# Altium PCB F030K6T6.pcbdoc
Units mil, origin at the board's own origin, x right, y up, seen from the top; angles counter-clockwise.
Board outline 2900 x 2885 mil, 2 copper layers (Top Layer, Bottom Layer); 42 components, 39 nets, 149 pads, 115 vias.
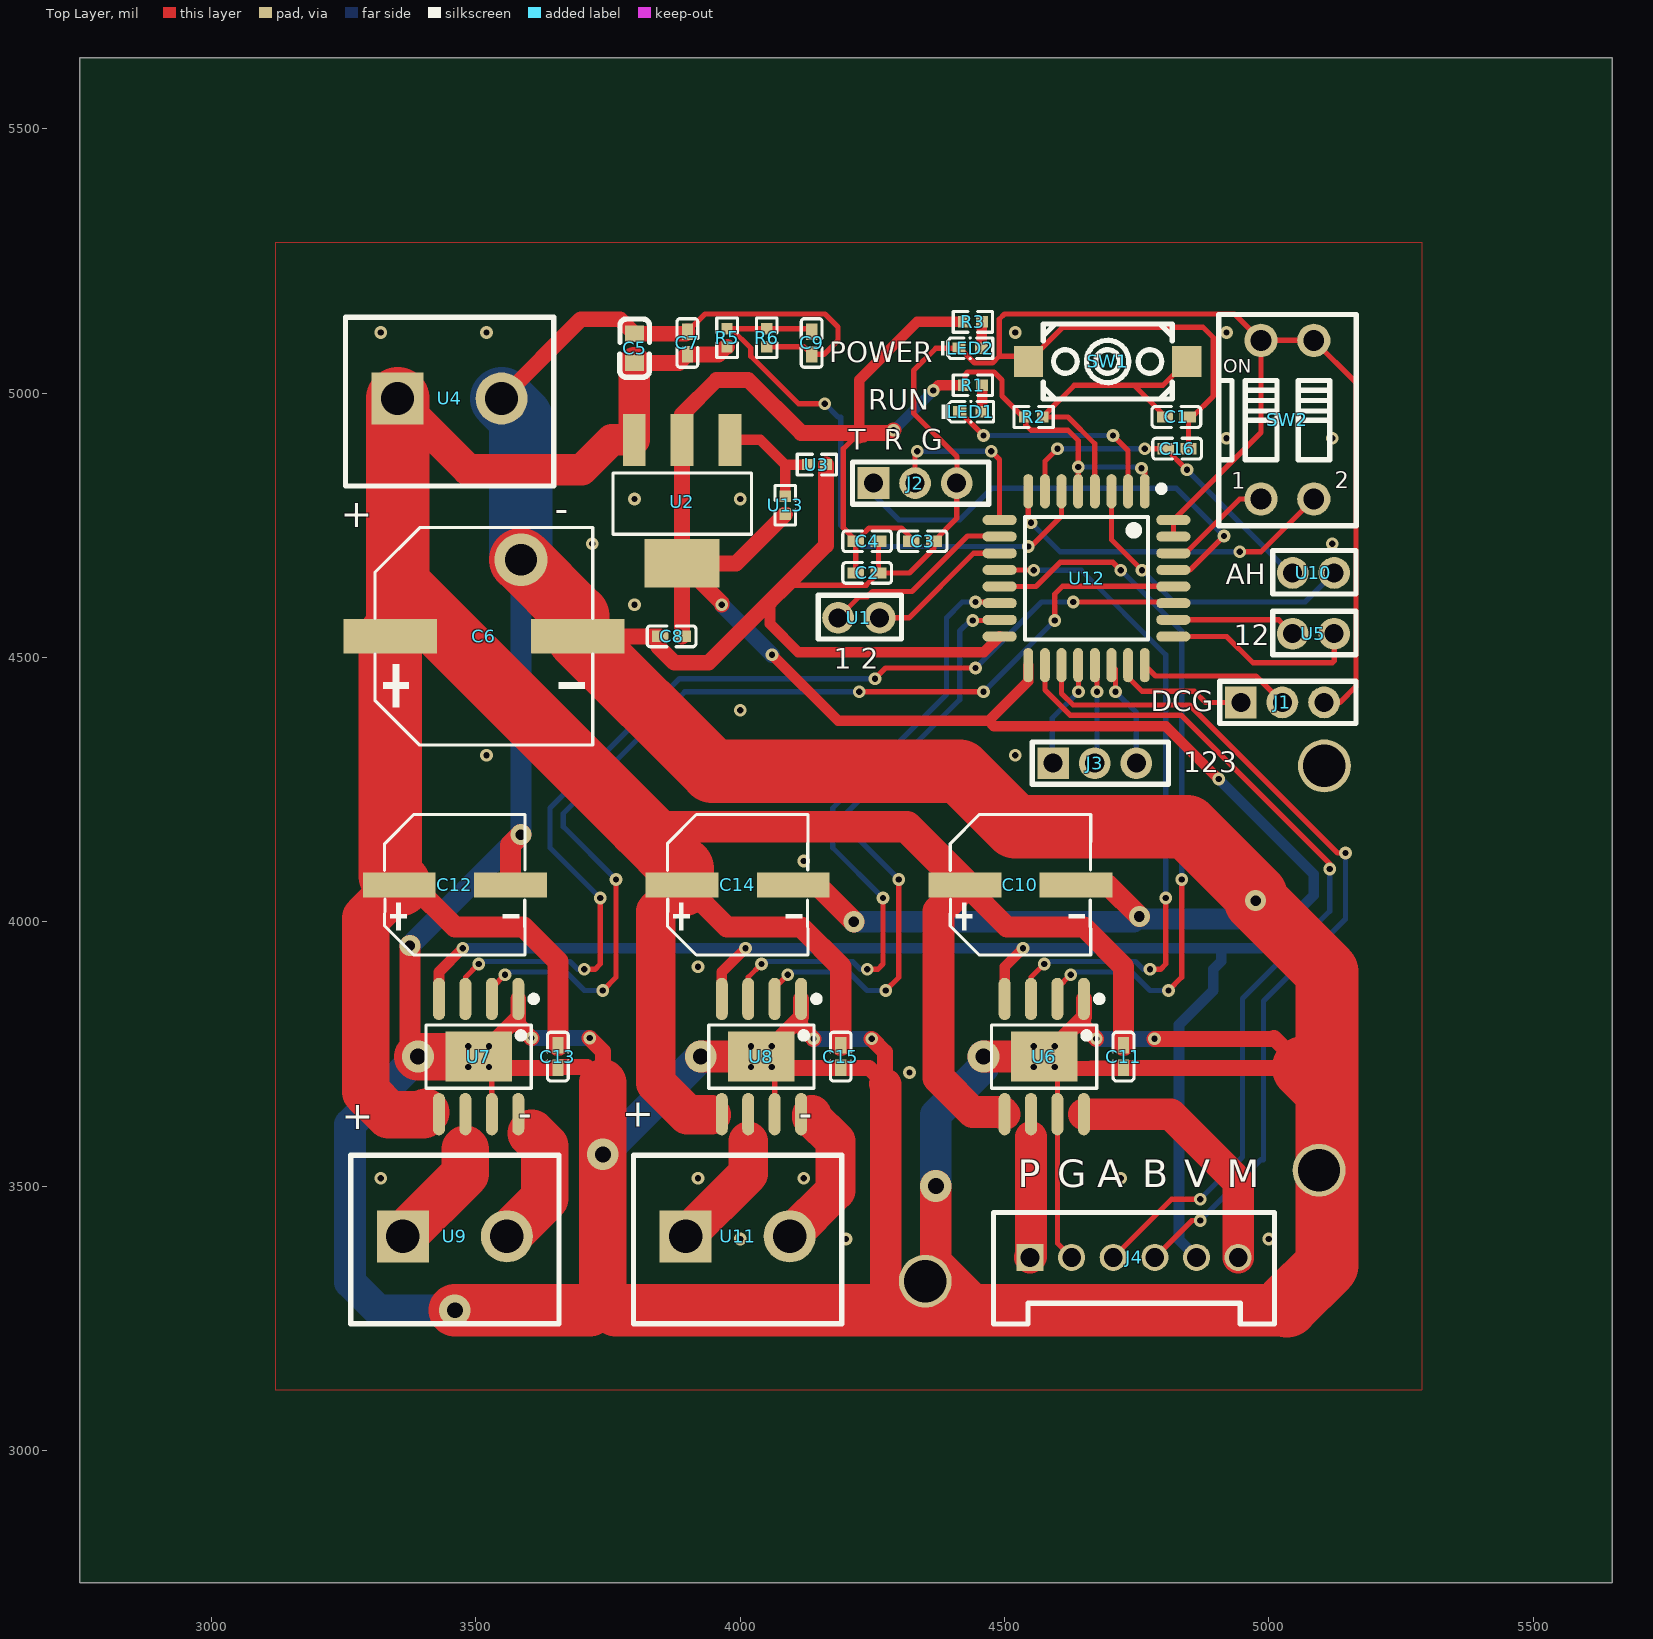
[diagram p0: Top Layer view]
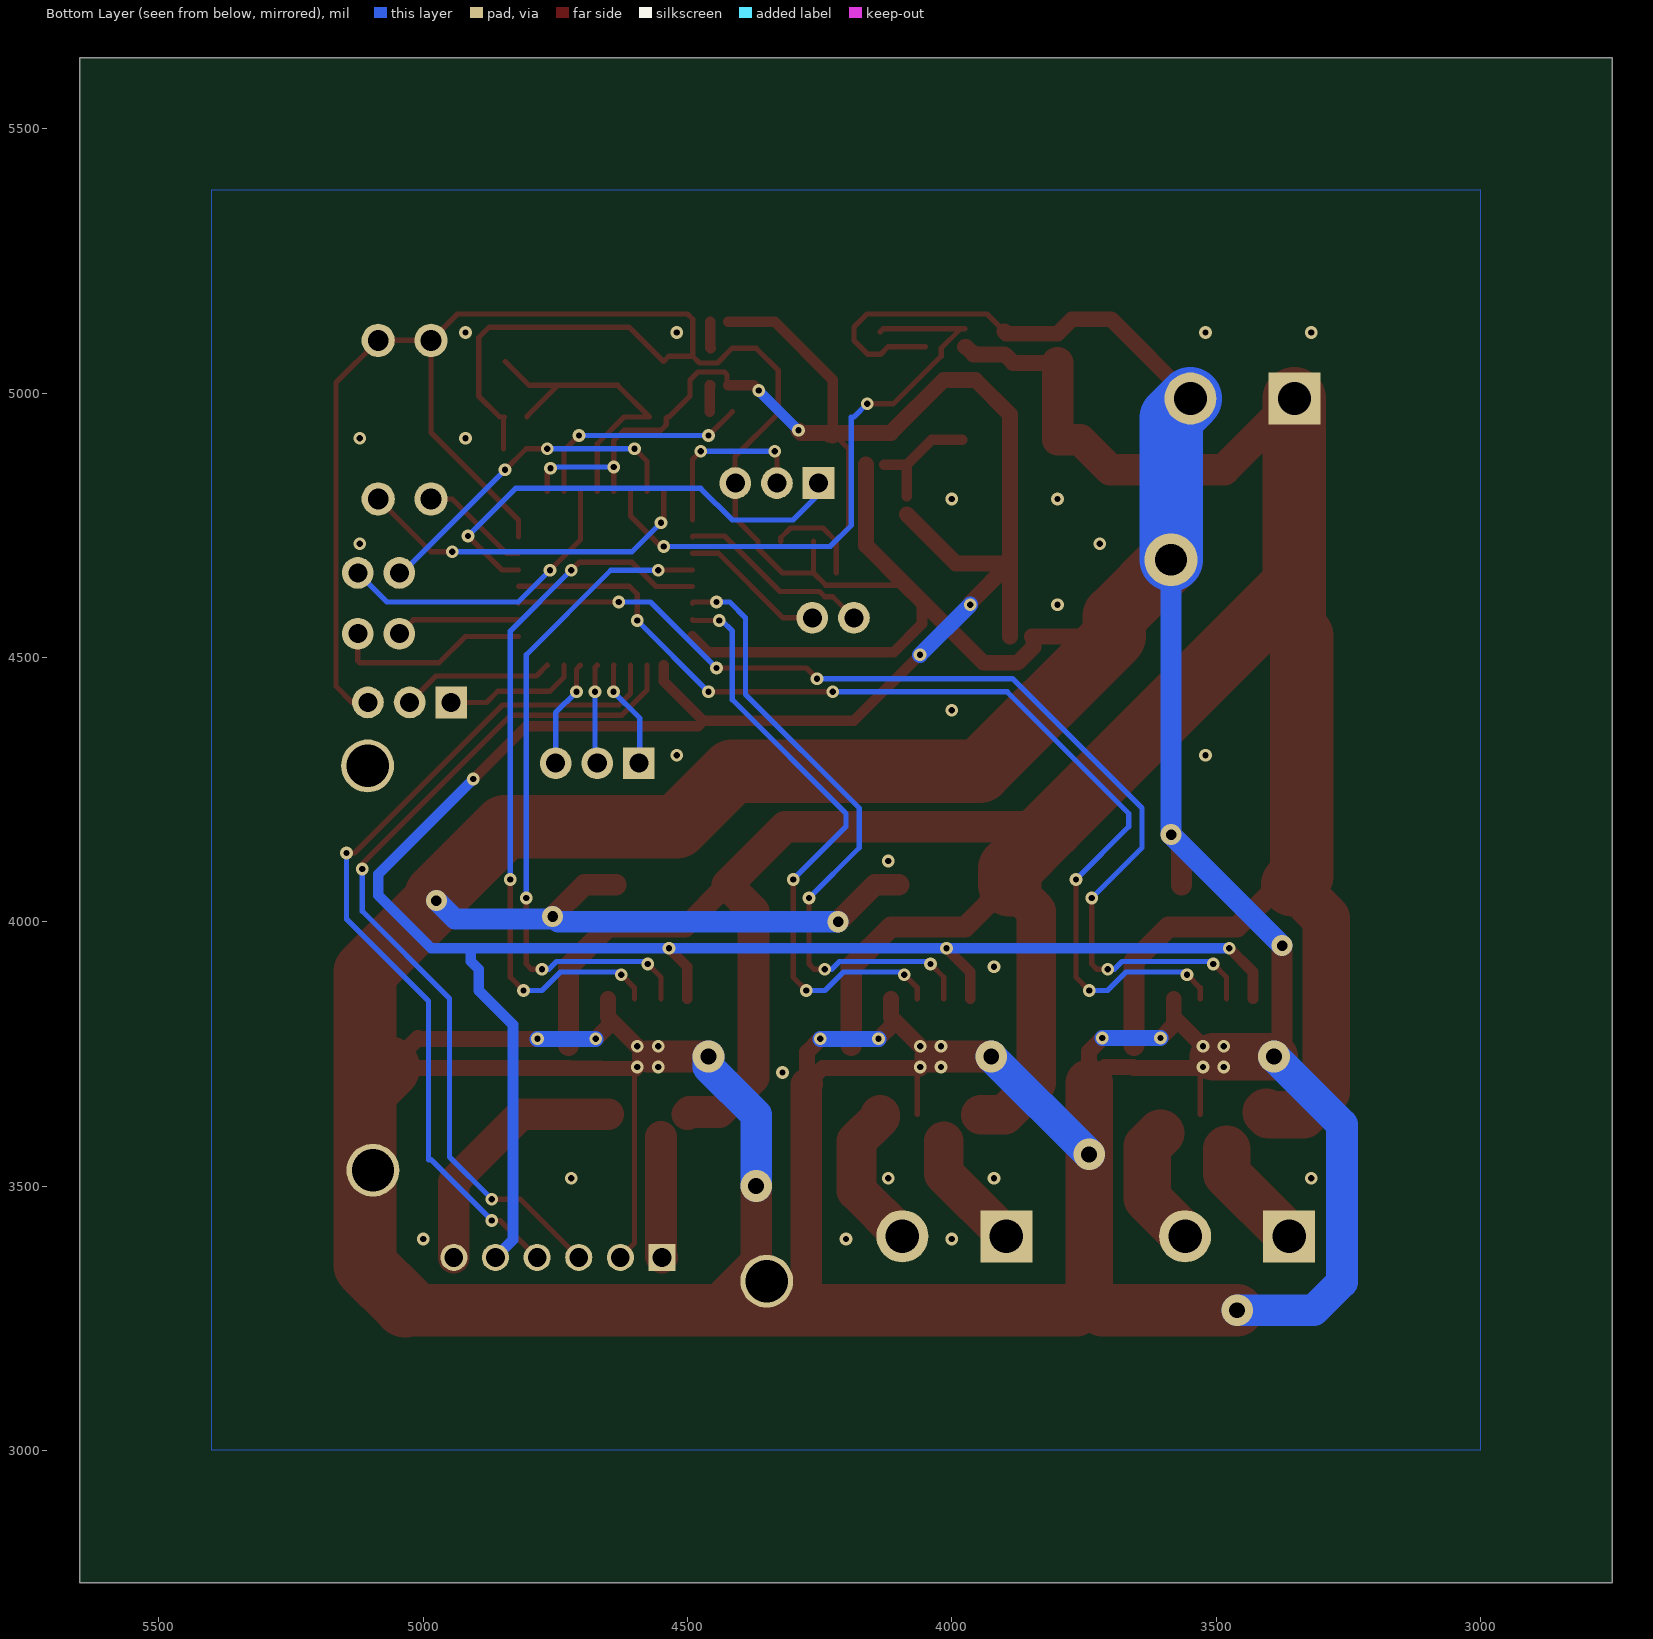
[diagram p1: Bottom Layer view, seen from below]

## Layer stack, top to bottom
Top Solder: solder mask 0.4, Solder Resist, Dk 3.5
Top Layer: signal copper 1.4
Dielectric 1: dielectric 12.6, FR-4, Dk 4.8
Bottom Layer: signal copper 1.4
Bottom Solder: solder mask 0.4, Solder Resist, Dk 3.5

## Board outline
5650,2750 2750,2750 2750,5635 5650,5635

## Components (designator, comment, footprint, x,y, rotation, side; value= is the part's Value field where it differs from the comment)
C1 "0402F104M500NT" C0402 4825,4955 r0 top
C2 "GRJ155R60J106ME11D" C0402 4240,4660 r180 top
C3 "0402F104M500NT" C0402 4345,4720 r180 top
C4 "0402F104M500NT" C0402 4240,4720 r180 top
C5 "GRT188R61H105KE13D" C0603 3800,5085 r270 top
C6 "RVT220UF50V67RV0021" CAP-SMD_BD10.0-L10.3-W10.3-LS11.0-FD 3515,4540 r0 top
C7 "0402F104M500NT" C0402 3900,5095 r270 top
C8 "LMK105BJ105KV-F" C0402 3870,4540 r0 top
C9 "LMK105BJ105KV-F" C0402 4135,5095 r90 top
C10 "XT47UF50V90RV0082" CAP-SMD_BD6.3-L6.6-W6.6-LS7.3-FD 4530,4070 r0 top
C11 "0402F104M500NT" C0402 4725,3745 r270 top
C12 "XT47UF50V90RV0082" CAP-SMD_BD6.3-L6.6-W6.6-LS7.3-FD 3460,4070 r0 top
C13 "0402F104M500NT" C0402 3655,3745 r270 top
C14 "XT47UF50V90RV0082" CAP-SMD_BD6.3-L6.6-W6.6-LS7.3-FD 3995,4070 r0 top
C15 "0402F104M500NT" C0402 4190,3745 r270 top
C16 "LMK105BJ105KV-F" C0402 4826.46,4895 r0 top
J1 "2.0MM 1X3P" 2.0MM-1X3P 5065,4415 r0 top
J2 "2.0MM 1X3P" 2.0MM-1X3P 4370,4830 r0 top
J3 "2.0MM 1X3P" 2.0MM-1X3P 4710,4300 r0 top
J4 "HY2.0-6P" HY2.0-6P 4745,3365 r180 top
LED1 "MHT136CRCT" LED0402-RD 4436.2,4965 r0 top
LED2 "MHT136CGCT" LED0402-RD_GREEN 4435,5085 r0 top
R1 "0402WGJ0123TCE" R0402 4440,5015 r0 top
R2 "0402WGJ0123TCE" R0402 4555,4955 r0 top
R3 "0402WGJ0123TCE" R0402 4440,5135 r0 top
R5 "RT0402CRE07100KL" R0402 3975,5105 r90 top
R6 "0402WGJ0123TCE" R0402 4050,5105 r270 top
SW1 "K2-1107ST-A4DW-06" KEY-SMD_L6.2-W3.6-LS8.0 4695,5060 r180 top
SW2 "DS-02RP" SW-TH_DS-02XP 5035,4950 r0 top
U1 "2.0MM/2P" 2.0MM/1*2P 4220,4575 r0 top
U2 "LM317" SOT-223-3_L6.5-W3.4-P2.30-LS7.0-BR 3890,4795 r90 top
U3 "SCR0402J20K" R0402 4145,4865 r0 top
U4 "DG127" CONN-TH_DG127-5.0-02P-14-1002A-H 3450,4990 r0 top
U5 "2.0MM/2P" 2.0MM/1*2P 5080,4545 r0 top
U6 "DRV8870DDAR" HSOP-8_L5.0-W4.0-P1.27-LS6.2-BL-EP 4575,3745 r180 top
U7 "DRV8870DDAR" HSOP-8_L5.0-W4.0-P1.27-LS6.2-BL-EP 3505,3745 r180 top
U8 "DRV8870DDAR" HSOP-8_L5.0-W4.0-P1.27-LS6.2-BL-EP 4040,3745 r180 top
U9 "DG127" CONN-TH_DG127-5.0-02P-14-1002A-H 3460,3405 r0 top
U10 "2.0MM/2P" 2.0MM/1*2P 5080,4660 r0 top
U11 "DG127" CONN-TH_DG127-5.0-02P-14-1002A-H 3995,3405 r0 top
U12 "STM32F030K6T6TR" LQFP-32_L7.0-W7.0-P0.80-LS9.0-TL 4655,4650 r270 top
U13 "SCR0402J20K" R0402 4085,4787.96 r90 top

## Footprints (in the part's own frame and the unit in brackets; to place one, negate y for a bottom-side part, rotate by r counter-clockwise, add the part's x,y. Pads: shape width x height; smd on the part's side, far side on the other; paste and mask are expansions set on the pad)
2.0MM-1X3P [mil]
  rect 60x60 hole 36: 1(-118.11,0)
  round 60 hole 36: 2(-39.37,0) 3(39.37,0)
  silkscreen extent -158,-40 100,40
2.0MM/1*2P [mil]
  round 60 hole 36: 1(-35.01,0.01) 2(43.59,0.01)
  silkscreen extent -72,-40 85,42
C0402 [mm]
  rect 0.79x0.54 smd: 1(-0.545,0) 2(0.545,0)
  silkscreen extent -1.17,-0.5 1.17,0.5
C0603 [mm]
  rect 0.8x0.9 smd: 1(-0.7,0) 2(0.7,0)
  silkscreen extent -1.41,-0.71 1.39,0.72
CAP-SMD_BD6.3-L6.6-W6.6-LS7.3-FD [mm]
  rect 3.5x1.2 smd: 1(-2.67,0) 2(2.67,0)
  silkscreen extent -3.38,-3.38 3.38,3.38
CAP-SMD_BD10.0-L10.3-W10.3-LS11.0-FD [mil]
  rect 177.2x65 smd: 1(-177.2,0) 2(177.2,0)
  silkscreen extent -206,-206 206,206
CONN-TH_DG127-5.0-02P-14-1002A-H [mm]
  rect 2.5x2.5 hole 1.6: 1(-2.5,0)
  round 2.5 hole 1.6: 2(2.5,0)
  silkscreen extent -5,-4.2 5,3.9
HSOP-8_L5.0-W4.0-P1.27-LS6.2-BL-EP [mil]
  oval 22.6x80.2 smd: 1(-75,-109) 2(-25,-109) 3(25,-109) 4(75,-109) 5(75,109) 6(25,109) 7(-25,109) 8(-75,109)
  rect 126x94.5 smd: 9(0,0)
  silkscreen extent -110,-115 100,60
HY2.0-6P [mm]
  rect 1.3x1.3 hole 0.9: 1(5,0)
  round 1.3 hole 0.9: 2(3,0) 3(1,0) 4(-1,0) 5(-3,0) 6(-5,0)
  silkscreen extent -6.75,-2.16 6.76,3.2
KEY-SMD_L6.2-W3.6-LS8.0 [mm]
  rect 1.4x1.5 smd: 1(-3.8,0) 2(3.8,0)
  silkscreen extent -3.1,-1.8 3.1,1.8
LED0402-RD [mil]
  rect 25.1x21.3 smd: 1(-21.2,0) 2(21.2,0)
  silkscreen extent -55,-21 43,21
LED0402-RD_GREEN [mil]
  rect 25.1x21.3 smd: 1(-21.2,0) 2(21.2,0)
  silkscreen extent -55,-21 43,21
LQFP-32_L7.0-W7.0-P0.80-LS9.0-TL [mil]
  oval 65x18.9 smd: 1(-164.4,110.2) 2(-164.4,78.7) 3(-164.4,47.2) 4(-164.4,15.7) 5(-164.4,-15.7) 6(-164.4,-47.2) 7(-164.4,-78.7) 8(-164.4,-110.2) 17(164.4,-110.2) 18(164.4,-78.7) 19(164.4,-47.2) 20(164.4,-15.7) 21(164.4,15.7) 22(164.4,47.2) 23(164.4,78.7) 24(164.4,110.2)
  oval 18.9x65 smd: 9(-110.2,-164.4) 10(-78.7,-164.4) 11(-47.2,-164.4) 12(-15.7,-164.4) 13(15.7,-164.4) 14(47.2,-164.4) 15(78.7,-164.4) 16(110.2,-164.4) 25(110.2,164.4) 26(78.7,164.4) 27(47.2,164.4) 28(15.7,164.4) 29(-15.7,164.4) 30(-47.2,164.4) 31(-78.7,164.4) 32(-110.2,164.4)
  silkscreen extent -175,-116 116,148
R0402 [mm]
  rect 0.566x0.54 smd: 1(-0.433,0) 2(0.433,0)
  silkscreen extent -0.94,-0.5 0.94,0.5
SOT-223-3_L6.5-W3.4-P2.30-LS7.0-BR [mm]
  rect 2.5x1.1 smd: 1(2.97,-2.3) 2(2.97,0) 3(2.97,2.3)
  rect 2.34x3.6 smd: 4(-2.97,0)
  silkscreen extent -1.57,-3.33 1.37,3.33
SW-TH_DS-02XP [mm]
  round 1.6 hole 1: 1(-1.27,3.81) 2(1.27,3.81) 3(1.27,-3.81) 4(-1.27,-3.81)
  silkscreen extent -3.29,-5.11 3.31,5.05

## Free pads (board coordinates)
  round 100 hole 80: 1(4350,3320) 1(5095,3530) 1(5105,4295)

## Via types
v1: diameter 24.02, hole 12.01, Top Layer to Bottom Layer, 67 vias
v2: diameter 24, hole 12, Top Layer to Bottom Layer, 36 vias
v3: diameter 60, hole 30, Top Layer to Bottom Layer, 6 vias
v4: diameter 40, hole 20, Top Layer to Bottom Layer, 5 vias
v5: diameter 100, hole 60, Top Layer to Bottom Layer, 1 vias

## Nets (pads, with @x,y where several pads share a name; then routed paths per layer and width w, separated by ;. In a path a pad name is that pad's centre, name@x,y a point inside that pad or via, vN(x,y) a via of type N, cw(c..) or ccw(c..) an arc to the next point about the centre after c; other vN are vias at no path point)
3V3: C2.2 C3.2 C4.2 C8.2 J4.5 R1.1 R2.1 R3.1 U2.2 U2.4 U6.4 U7.4 U8.4 U12.1 U12.5 U12.17 U13.1 | length 6878.6
  Top Layer w10: C2.2 C4.2 ; 4225,4925 4195,4895 4195,4745 4218.54,4721.46 C4.2 ; C3.2 4323.54,4726.46 4305,4745 4243.54,4745 C4.2 ; R1.1 4425,5017.04 4425,5035 4430,5040 4480,5040 4495,5025 4495,4995 4535,4955 R2.1 4540,4952.96 4540,4940 4550,4930 4620,4930 4639.3,4910.7 v1(4639.3,4860.5) U12.5 ; v1(4759.1,4858) 4765.2,4851.9 U12.1
  Top Layer w20: U7.4 3430,3905 v1(3475,3950) ; U8.4 3965,3905 v1(4010,3950) ; v1(4060,4505) 4185,4380 4469.98,4380 ; 4233.54,4916.46 4225,4925 4225,5025 4335,5135 R3.1 ; v1(4365,5005) 4375,5015 R1.1 ; U6.4 4500,3915 v1(4535,3950) ; U12.17 4544.8,4454.82 4469.98,4380 ; v1(4905,4270) 4805,4370 4479.98,4370 4469.98,4380
  Top Layer w30: C8.2@3890,4540 U2.4 ; v1(3965,4600) 3965,4603.07 U2.4 ; U13.1 3992.15,4678.07 U2.4 ; 4225,4919.89 4225,4925 4115,4925 4015,5025 3955,5025 3890,4960 U2.2 U2.4 ; 4230.11,4925 4285,4925 v1(4290,4930)
  Bottom Layer w10: v1(4060,4505) v1@4065,4505 ; v1(4639.3,4860.5) 4749.5,4860.5 v1@4750,4860
  Bottom Layer w20: v1(3475,3950) v1(4010,3950) v1(4535,3950) 4910,3950 ; v1(4290,4930) v1(4365,5005) ; J4.5 4830,3398.11 4830,3805 4895,3870 4895,3910 4910,3925 4910,3950 ; v1(4905,4270) 5085,4090 5085,4050 4985,3950 4910,3950
  Bottom Layer w30: v1(3965,4600) v1(4060,4505)
$1N6449: LED1.2 R1.2 | length 50.1
  Top Layer w20: R1.2 4457.4,5014.64 LED1.2
$1N6841: LED2.2 R3.2 | length 50.3
  Top Layer w20: LED2.2 4457.04,5085.84 R3.2
$1N8490: U2.1 U3.1 U13.2 | length 226.8
  Top Layer w20: U2.1 4038.07,4911.93 4085,4865 ; U13.2 4085,4865 ; U3.1 4085,4865
ADC_IN0: C9.2 R5.2 R6.1 U12.6 | length 1157.2
  Top Layer w10: R5.2 R5.2@3982.96,5122.04 ; C9.2 4129.42,5122.04 R6.1 R5.2@3982.96,5122.04 ; v1(4160,4980) 4110,4980 4020,5070 4020,5085 R5.2@3982.96,5122.04 ; v1(4545,4710) 4550,4710 4607.8,4767.8 U12.6
  Bottom Layer w10: v1(4160,4980) 4185,4955 4190,4955 4190,4750 4230,4710 v1(4545,4710)
ADC_IN1: C16.1 U10.1 U12.7 | length 632.8
  Top Layer w10: U12.7 4576.3,4871.3 v1(4600,4895) ; v1(4765,4895) C16.1 v1(4845,4855)
  Bottom Layer w10: v1(4600,4895) v1(4765,4895) ; v1(4845,4855) 5040,4660 U10.1
EXIT1: J3.1 U12.20 | length 207.4
  Top Layer w10: U12.20 4640,4484.9 v1(4640,4435)
  Bottom Layer w10: J3.1 4590,4301.89 4590,4385 v1(4640,4435)
EXIT2: J3.2 U12.21 | length 189.2
  Top Layer w10: U12.21 4675,4481.3 v1(4675,4435)
  Bottom Layer w10: J3.2 4675,4304.37 v1(4675,4435)
EXIT3: J3.3 U12.22 | length 205.1
  Top Layer w10: U12.22 4710,4477.8 v1(4710,4435)
  Bottom Layer w10: v1(4710,4435) 4749.37,4395.63 J3.3
GND: C1.2 C2.1 C3.1 C4.1 C5.1 C6.2 C7.1 C8.1 C9.1 C10.2 C11.2 C12.2 C13.2 C14.2 C15.2 C16.2 J1.3 J2.3 J4.2 LED2.1 pad.1 R6.2 SW1.2 SW2.1 SW2.2 U3.2 U4.2 U6.1 U6.7 U6.9 U7.1 U7.7 U7.9 U8.1 U8.7 U8.9 U12.16 U12.31 U12.32 | length 18100.1
  Top Layer w10: U7.9 U7.9@3524.7,3764.7 ; U7.9@3524.7,3725.3 3526.46,3723.54 3530,3720 U7.7 ; C7.1 3933.54,5150 4160,5150 4185,5125 4185,5100 4158.54,5073.54 C9.1 4120.58,5087.96 R6.2 ; U8.9@4059.7,3725.3 4061.46,3723.54 4062.92,3722.08 4065,3720 U8.7 ; 4086.73,4636.73 4238.19,4636.73 C2.1 ; C4.1 C2.1 ; LED2.1 4370,5085 4327.92,5042.92 4327.92,4962.08 4410,4880 4410,4830.63 J2.3 4409.37,4762.91 C3.1 4366.46,4706.46 4320,4660 C2.1 ; LED2.1@4415.7,5085 4443.35,5057.35 4477.35,5057.35 4490,5070 ; U6.9@4594.7,3725.3 4597.92,3722.08 4600,3720 U6.7 4600,3391.89 J4.2 ; U12.31 U12.32 4985,4925.8 SW2.1 ; C16.2 4847.92,4953.54 C1.2 4855,4955 4895,4995 4895,5105 4875,5125 4610.4,5125 SW1.2 4535.4,5070 4490,5070 ; J1.3 5134.37,4415 5165,4445.63 5165,5020 SW2.2 SW2.1 ; 4490,5070 4490,5140 4500,5150 4935,5150 SW2.1
  Top Layer w20: 4056.2,4606.2 4056.2,4563.8 4110,4510 4460.8,4510 U12.16
  Top Layer w30: U7.9@3524.7,3764.7 U7.1@3580,3820 ; U7.9@3526.46,3723.54 C13.2 3656.46,3725 3710,3725 3740,3695 3740,3755 v1(3715,3780) ; U4.2 3698.43,5140 3772.56,5140 C5.1 3896.1,5112.56 C7.1 ; U7.1 U7.1@3580,3820 ; v1(3605,3780) 3580,3805 U7.1@3580,3820 ; C6.2 C8.1@3845,4540 ; C8.1 C8.1@3845,4540 ; U8.9@4059.7,3764.7 U8.1@4113.54,3818.54 ; U8.9@4060,3722.08 4062.92,3722.08 C15.2@4188.54,3723.54 ; U8.9@4061.46,3723.54 C15.2@4188.54,3723.54 ; U8.1 4115,3820 U8.1@4113.54,3818.54 ; v1(4138.54,3778.54) 4113.54,3803.54 U8.1@4113.54,3818.54 ; U3.2 4162.04,4712.04 4086.73,4636.73 4056.2,4606.2 3940,4490 3875,4490 3845,4520 C8.1@3845,4540 ; v1(4248.54,3778.54) 4273.54,3753.54 4273.54,3693.54 4243.54,3723.54 C15.2 C15.2@4188.54,3723.54 ; U6.9@4594.7,3764.7 U6.1@4648.54,3818.54 ; U6.9@4597.92,3722.08 C11.2@4723.54,3723.54 ; U6.1 4650,3820 U6.1@4648.54,3818.54 ; v1(4673.54,3778.54) 4648.54,3803.54 U6.1@4648.54,3818.54 ; C11.2 5065.98,3723.54 5066.22,3723.78 5010,3780 5008.54,3778.54 v1(4783.54,3778.54)
  Top Layer w40: v4(3375,3955) 3375,3760.19 v3(3390.19,3745) ; C12.2 3565.12,4145.12 v4(3585,4165) ; C14.2 4145,4070 v4(4215,4000) ; C10.2 4695,4070 v4(4755,4010)
  Top Layer w60: 3765,3265 3780,3250 ; v3(3925.19,3745) U8.9 ; 4240,3265 4275,3300 4275,3692.08 4273.54,3693.54 ; v3(4370,3500) 4370,3357.4 4462.4,3265 ; v3(4460.19,3745) U6.9
  Top Layer w90: v3(3390.19,3745) U7.9 ; 3740,3695 v3(3740,3560) 3740,3290 3765,3265
  Top Layer w100: v3(3460,3265) 3715,3265 3740,3290 ; 3765,3265 4240,3265 4390,3265 4462.4,3265 5025,3265 5033.8,3273.8
  Top Layer w120: v5(3585,4685) 3692.2,4577.8 C6.2 3947.2,4285 4415,4285 4520,4180 4845.32,4180 4975,4050.32 v4(4975,4040) 5110,3905 5110,3680 ; 5033.8,3273.8 5110,3350 5110,3551.04 5110,3680 ; 5066.22,3723.78 5110,3680
  Bottom Layer w30: v1(3605,3780) v1(3715,3780) ; v1(4138.54,3778.54) v1(4248.54,3778.54) ; v1(4673.54,3778.54) v1(4783.54,3778.54)
  Bottom Layer w40: v4(3375,3955) v4(3585,4165) v5(3585,4685) ; v4(4215,4000) 4745,4000 v4(4755,4010) 4760,4005 4940,4005 v4(4975,4040)
  Bottom Layer w60: v3(3390.19,3745) 3261.8,3616.61 3261.8,3318.2 3315,3265 v3(3460,3265) ; v3(3740,3560) 3925,3745 v3(3925.19,3745) ; v3(4370,3500) 4370,3635 4460.19,3725.19 v3(4460.19,3745)
  Bottom Layer w120: U4.2 3585,4953.43 v5(3585,4685)
  other v1: 4248.54,3778.54 4783.54,3778.54 3585,4685
  other v2: 4000,3400 4200,3400 5000,3400 3320,3515 3920,3515 4120,3515 4720,3515 4320,3715 3920,3915 4120,4115 3520,4315 4520,4315 4000,4400 3800,4600 3720,4715 5120,4715 3800,4800 4000,4800 4920,4915 5120,4915 3320,5115 3520,5115 4520,5115 4920,5115
HEAT: U10.2 U12.3 | length 584.6
  Top Layer w10: U12.3 4702.2,4722.8 v1(4760,4665)
  Bottom Layer w10: v1(4760,4665) 4820,4605 5068.59,4605 U10.2
LED: LED1.1 U12.2 | length 426.1
  Top Layer w10: LED1.1 v1(4460,4920) ; v1(4705,4920) 4733.7,4891.3 U12.2
  Bottom Layer w10: v1(4460,4920) v1(4705,4920)
M1_A: J4.3 U12.18 | length 1668.2
  Top Layer w10: U12.18 4576.3,4438.7 4624,4391 4834,4391 5115,4110 v1(5115,4100) ; J4.3 4815.63,3475 v1(4870,3475)
  Bottom Layer w10: v1(4870,3475) 4950,3555 4950,3855 5115,4020 v1(5115,4100)
M1_B: J4.4 U12.19 | length 1642.2
  Top Layer w10: U12.19 4607.8,4432.2 4630,4410 4850,4410 5130,4130 v1(5145,4130) ; J4.4 4854.37,3435 v1(4870,3435)
  Bottom Layer w10: v1(4870,3435) 4985,3550 4990,3550 4990,3850 5145,4005 v1(5145,4130)
M1_M: U6.2 U12.13 | length 1365.5
  Top Layer w10: U12.13 4559.3,4634.3 4605,4680 4705,4680 v1(4720,4665) ; U6.2 4600,3875 v1(4625,3900) ; v1(4810,3870) 4835,3895 v1(4835,4080)
  Bottom Layer w10: v1(4625,3900) 4630,3905 4740,3905 4775,3870 v1(4810,3870) ; v1(4720,4665) 4835,4550 v1(4835,4080)
M1_P: U6.3 U12.12 | length 1284.7
  Top Layer w10: U12.12 4554.3,4665.7 v1(4555,4665) ; U6.3 4550,3895 v1(4575,3920) ; v1(4775,3910) 4795,3910 4805,3920 v1(4805,4045)
  Bottom Layer w10: v1(4555,4665) 4645,4665 4805,4505 v1(4805,4045) ; v1(4575,3920) 4580,3925 4747.63,3925 4762.63,3910 v1(4775,3910)
M1MO: J4.6 U6.8 | length 488
  Top Layer w60: U6.8 4814,3636 4941.85,3508.15 J4.6
M1PO: J4.1 U6.6 | length 228.7
  Top Layer w60: J4.1 4550,3366.85 4550,3592.92
M2_M: U7.2 U12.28 | length 2006.8
  Top Layer w10: U7.2 3530,3875 v1(3555,3900) ; v1(3740,3870) 3765,3895 v1(3765,4080) ; v1(4225,4435) v1(4460,4435) ; v1(4595,4570) 4595,4620 4610,4635 4818.7,4635 U12.28
  Bottom Layer w10: v1(3555,3900) 3560,3905 3670,3905 3705,3870 v1(3740,3870) ; v1(3765,4080) 3665,4180 3665,4205 3895,4435 v1(4225,4435) ; v1(4460,4435) v1(4595,4570)
M2_P: U7.3 U12.27 | length 1995
  Top Layer w10: U7.3 3480,3895 v1(3505,3920) ; v1(3705,3910) 3725,3910 3735,3920 v1(3735,4045) ; v1(4255,4460) 4275,4480 v1(4445,4480) ; v1(4630,4605) 4817.2,4605 U12.27
  Bottom Layer w10: v1(3505,3920) 3510,3925 3677.63,3925 3692.63,3910 v1(3705,3910) ; v1(3735,4045) 3640,4140 3640,4215 3885,4460 v1(4255,4460) ; v1(4445,4480) 4570,4605 v1(4630,4605)
M2MO: U7.8 U9.2 | length 235
  Top Layer w90: U9.2 3630,3476.57 3630,3575 3605,3600
M2PO: U7.6 U9.1 | length 214.1
  Top Layer w90: U9.1 3480,3523.42 3480,3570.03
M3_M: U8.2 U12.15 | length 1163.2
  Top Layer w10: U8.2 4065,3875 v1(4090,3900) ; v1(4275,3870) 4300,3895 v1(4300,4080) ; v1(4440,4570) 4489.3,4570 U12.15
  Bottom Layer w10: v1(4090,3900) 4095,3905 4205,3905 4240,3870 v1(4275,3870) ; v1(4300,4080) 4200,4180 4200,4205 4415,4420 4415,4550 4435,4570 v1(4440,4570)
M3_P: U8.3 U12.14 | length 1216.1
  Top Layer w10: U8.3 4015,3895 v1(4040,3920) ; v1(4240,3910) 4260,3910 4270,3920 v1(4270,4045) ; v1(4445,4605) 4488.4,4605 U12.14
  Bottom Layer w10: v1(4040,3920) 4045,3925 4212.63,3925 4227.63,3910 v1(4240,3910) ; v1(4270,4045) 4175,4140 4175,4215 4390,4430 4390,4575 4420,4605 v1(4445,4605)
M3MO: U8.8 U11.2 | length 284.5
  Top Layer w75: U11.2 4180,3491.57 4180,3585 4135,3630 4135,3635
M3PO: U8.6 U11.1 | length 228.8
  Top Layer w75: U11.1 4015,3523.42 4015,3584.77
NRST: C1.1 R2.2 SW1.1 U12.4 | length 609.9
  Top Layer w10: U12.4 4670.7,4904.3 4620,4955 R2.2 4632.04,5015 4745,5015 ; C1.1 4803.54,4956.46 4745,5015 ; SW1.1 4799.6,5015 4745,5015
SIGN1: SW2.3 U12.8 | length 660.8
  Top Layer w10: U12.8 4545,4814.2 4545,4760 v1(4550,4755) ; v1(4945,4700) 4985,4700 SW2.3
  Bottom Layer w10: v1(4550,4755) 4605,4700 v1(4945,4700)
SIGN2: SW2.4 U12.30 | length 208.2
  Top Layer w10: U12.30 4842.2,4697.2 4945,4800 SW2.4
SWCLK: J1.2 U12.24 | length 289.7
  Top Layer w10: U12.24 4785.8,4465 4975.63,4465 J1.2
SWDIO: J1.1 U12.23 | length 235.9
  Top Layer w10: U12.23 4733.7,4462.55 4760.15,4436.1 4858.9,4436.1 4880,4415 J1.1@4926.89,4415
TODO1: U5.1 U12.26 | length 243.6
  Top Layer w10: U12.26 5018.7,4571.3 U5.1@5050,4540
TODO2: U5.2 U12.25 | length 377.7
  Top Layer w10: U12.25 4920.2,4539.8 4970,4490 5120,4490 5123.6,4493.6 U5.2
U1_RX: J2.2 U12.9 | length 338.1
  Top Layer w10: J2.2 4330.63,4885.63 v1(4335,4890) ; v1(4475,4890) 4490.6,4874.4 U12.9
  Bottom Layer w10: v1(4335,4890) v1(4475,4890)
U1_TX: J2.1 U12.29 | length 889.3
  Top Layer w10: U12.29 4850.7,4665.7 v1(4915,4730)
  Bottom Layer w10: J2.1 4251.89,4808.11 4300,4760 4415,4760 4475,4820 4825,4820 v1(4915,4730)
VIN: C5.2 C6.1 C7.2 C10.1 C11.1 C12.1 C13.1 C14.1 C15.1 R5.1 U2.3 U4.1 U6.5 U7.5 U8.5 | length 6384.1
  Top Layer w30: C5.2 3883.9,5057.44 C7.2 3958.54,5073.54 3972.96,5087.96 R5.1
  Top Layer w40: C12.1 3380,4070 3460,3990 3590,3990 3655,3925 C13.1 ; C14.1 3895,4070 3975,3990 4115,3990 4190,3915 C15.1 ; C10.1 4504.88,3990 4650,3990 4725,3915 C11.1
  Top Layer w60: U4.1@3351.58,4988.42 3485,4855 3700,4855 3756.93,4911.93 U2.3 3799.45,5056.89 C5.2 ; 3810,4180 4314.88,4180 C10.1 4375,4020.12 4375,3705 4440,3640 4496,3640 U6.5
  Top Layer w75: C14.1 3840,4020.12 3840,3695 3900,3635 3945,3635
  Top Layer w90: C12.1 3291.8,4006.92 3291.8,3678.2 3335,3635 3400,3635 3405,3640
  Top Layer w120: C6.1 3337.8,4087.08 C12.1 ; C6.1@3351.58,4553.78 3351.58,4635 ; U4.1 3351.58,4988.42 3351.58,4635 ; C14.1 3889.88,4100.12 3810,4180 3355,4635 3351.58,4635
WIND1: U1.1 U12.10 | length 370.3
  Top Layer w10: U1.1 4224.99,4615 4240,4615 4250,4625 4325,4625 4430,4730 4489.3,4730 U12.10
WIND2: U1.2 U12.11 | length 277.6
  Top Layer w10: U1.2 4318.9,4575 4441.1,4697.2 U12.11
"": 
copper on no net:
  other v2: 3485.3,3725.3 3524.7,3725.3 4020.3,3725.3 4059.7,3725.3 4555.3,3725.3 4594.7,3725.3 3485.3,3764.7 3524.7,3764.7 4020.3,3764.7 4059.7,3764.7 4555.3,3764.7 4594.7,3764.7

## Polygon pours and split planes (outlines as drawn)
GND on Top Layer (solid, remove dead copper): 3120,3115 5290,3115 5290,5285 3120,5285
GND on Bottom Layer (solid, remove dead copper, pour order 1): 3000,3000 5400,3000 5400,5385 3000,5385

## Silkscreen, mask and mechanical layers (free items; w line width, h text height)
Top Overlay:
  text "POWER" at 4168.26,5058.32 h38.94
  text "RUN" at 4241.68,4968.32 h38.94
  text "T  R  G" at 4204.84,4893.32 h38.94
  text "-" at 3648.95,4755.96 h52.3
  text "+" at 3243.95,4745.96 h52.3
  text "AH" at 4918.39,4638.32 h38.94
  text "12" at 4933.39,4523.32 h38.94
  text "1 2" at 4176.68,4478.32 h38.94
  text "DCG" at 4776.68,4398.32 h38.94
  text "123" at 4837.73,4283.32 h38.94
  text "-" at 3580,3612.57 h52.3
  text "+" at 3776.34,3612.57 h52.3
  text "-" at 4110.59,3612.57 h52.3
  text "+" at 3245.75,3607.57 h52.3
  text "P" at 4525,3497.57 h52.3
  text "G" at 4600,3497.57 h52.3
  text "A" at 4675,3497.57 h52.3
  text "B" at 4760,3497.57 h52.3
  text "V" at 4840,3497.57 h52.3
  text "M" at 4920,3497.57 h52.3
Mechanical 1:
  lines w10: 3220,3202 5188,3202 5188,5170 3220,5170 3220,3202

## Text inside footprints (layer, text, board x,y; h text height)
SW2: Top Overlay "1" at 4929.16,4819.41 h30.88; Top Overlay "2" at 5125,4820.38 h30.88; Top Overlay "ON" at 4913.94,5038.74 h25.55